# Altium PCB PCB2.PcbDoc
Units mm, origin at the board's own origin, x right, y up, seen from the top; angles counter-clockwise.
Board outline 113.63 x 80 mm, 2 copper layers (Top Layer, Bottom Layer); 39 components, 69 nets, 397 pads, 94 vias.
Unrouted connection lines stored in the file: 1.
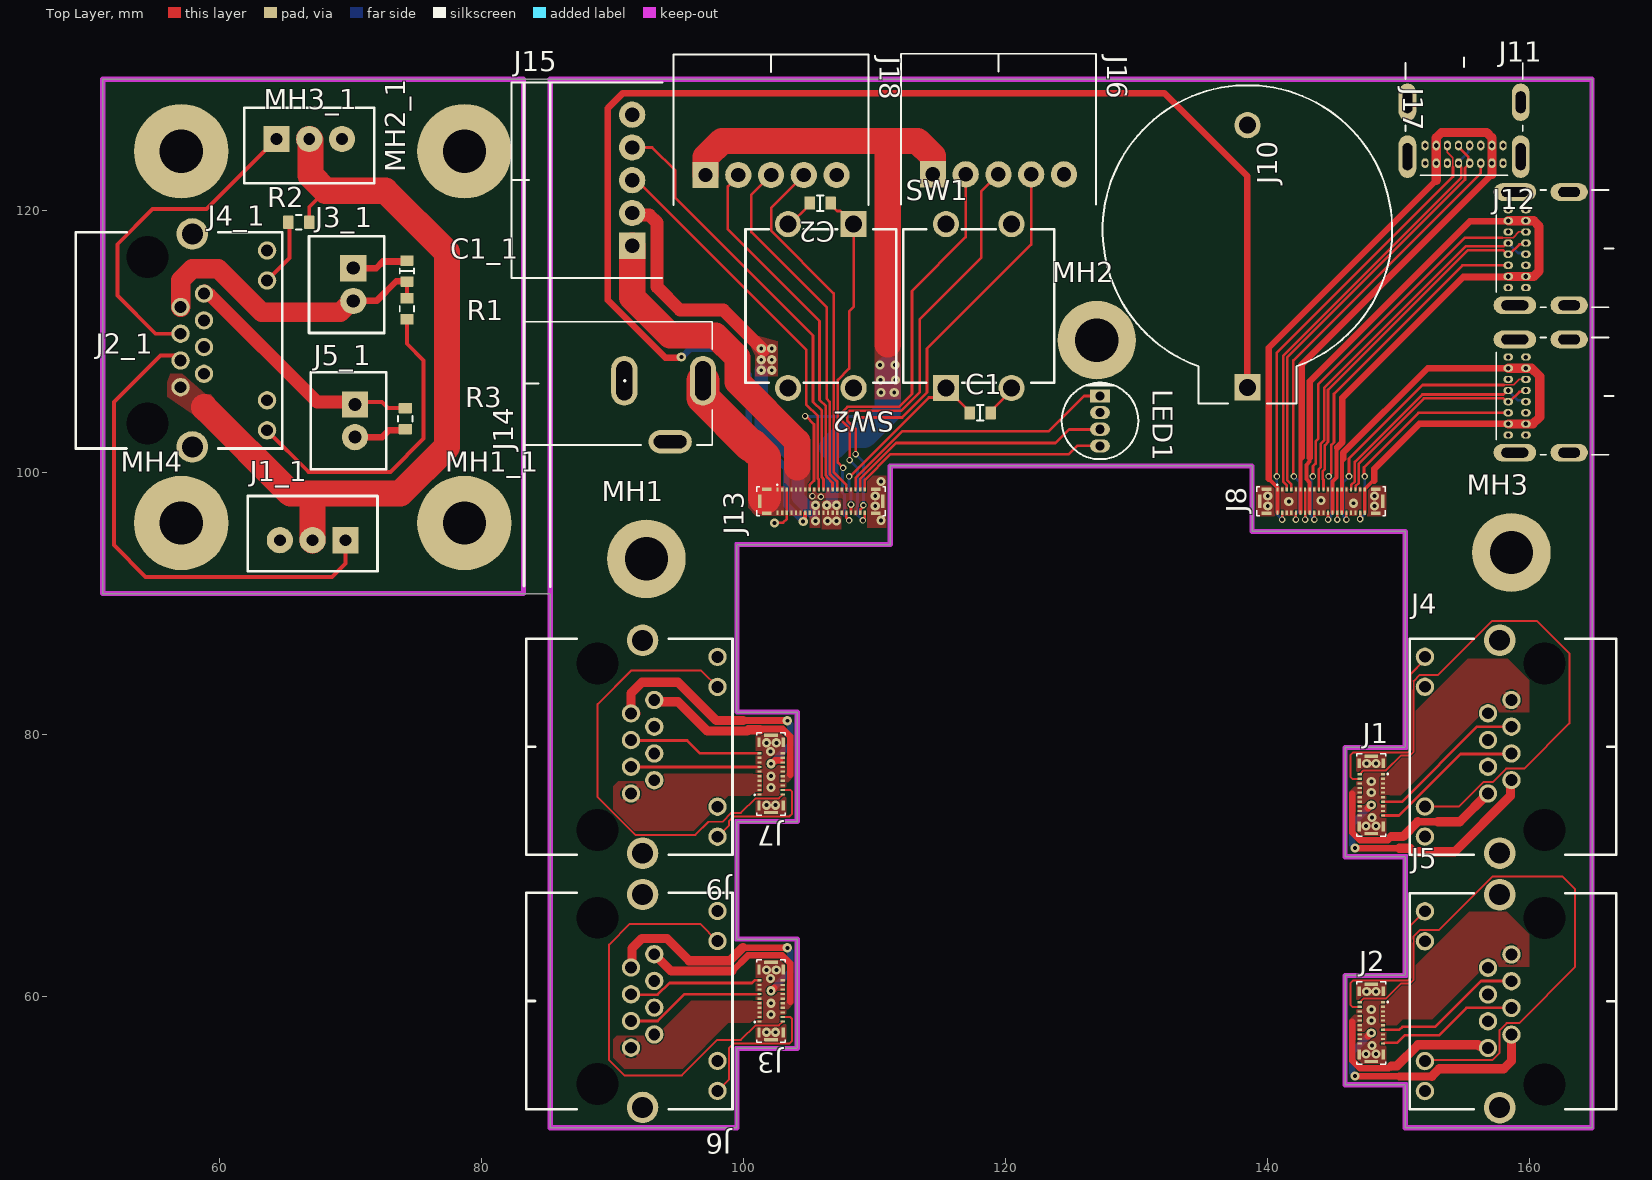
[diagram p0: Top Layer view]
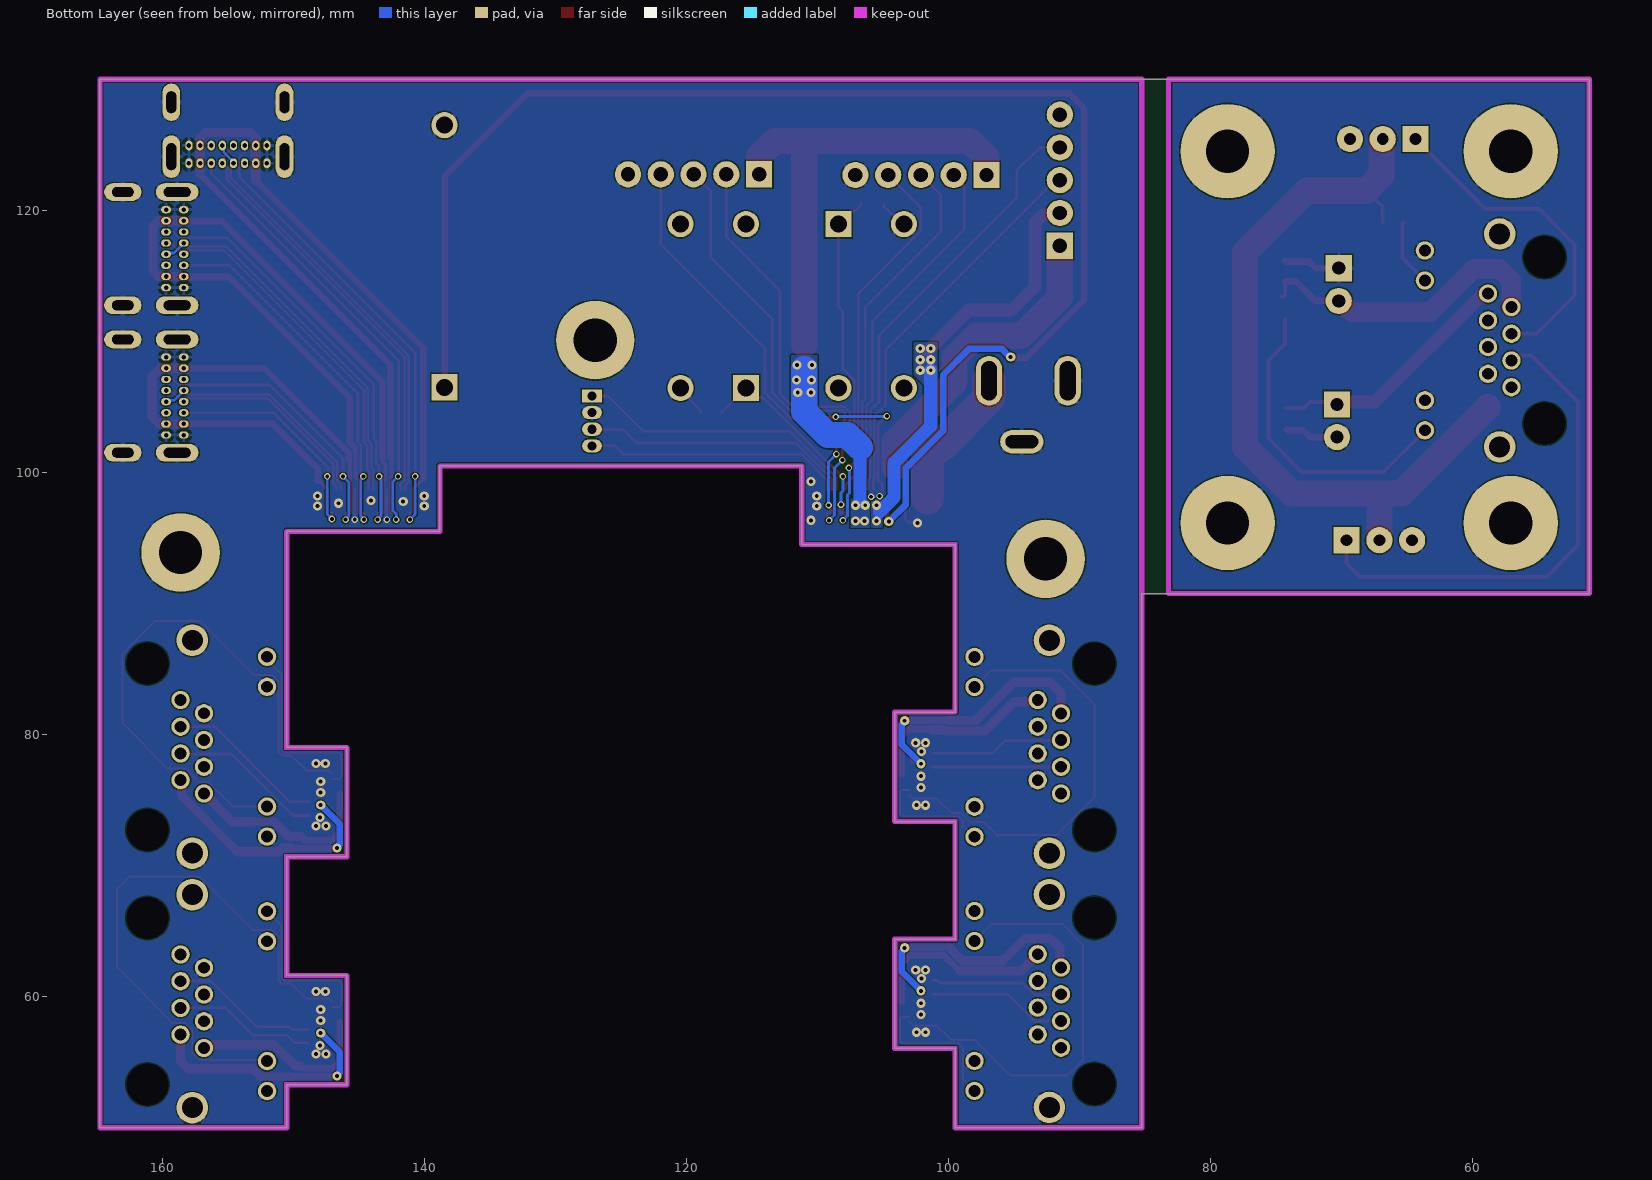
[diagram p1: Bottom Layer view, seen from below]

## Layer stack, top to bottom
Top Solder: solder mask 0.0102, Solder Resist, Dk 3.5
Top Layer: signal copper 0.0356
Dielectric 1: dielectric 0.32, FR-4, Dk 4.8
Bottom Layer: signal copper 0.0356
Bottom Solder: solder mask 0.0102, Solder Resist, Dk 3.5

## Board outline
85.25,50 99.5,50 99.5,56.05 104.1,56.05 104.1,64.4 99.5,64.4 99.5,73.35 104.1,73.35 104.1,81.7 99.508,81.7 99.5,81.692 99.5,94.5 111.2,94.5 111.2,100.5 138.8,100.5 138.8,95.5 150.5,95.5 150.5,79.026 145.9,79.026 145.9,70.677 150.5,70.677 150.5,61.624 145.9,61.624 145.9,53.275 150.5,53.275 150.5,50 164.75,50 164.75,130 89.15,130 89.168,130 51.124,130 51.124,90.75 85,90.75 85.001,90.749 85.25,90.749

## Design rules (kind name [scope] priority, off if disabled: settings)
Clearance [All] p1: gap=0.1 ignorepadtopadclearanceinfootprint=FALSE
HoleSize [All] p1: absolutevalues=TRUE maxlimit=6 minlimit=0.3 maxpercent=80.000 minpercent=20.000
HoleToHoleClearance [All] p1: gap=0.2 allowstackedmicrovias=TRUE
MinimumSolderMaskSliver [All] p1: minsoldermaskwidth=0.1
PlaneClearance [All] p1: clearance=0.2
PlaneConnect [All] p1: pad.planeconnectstyle=Relief pad.reliefexpansion=0.508 pad.reliefentries=4 pad.reliefconductorwidth=0.3 pad.reliefairgap=0.1 via.planeconnectstyle=Direct via.reliefexpansion=0.508 via.reliefentries=4 via.reliefconductorwidth=0.254 via.reliefairgap=0
PolygonConnect [All] p1: thpad.connectstyle=Relief thpad.reliefconductorwidth=0.3 thpad.reliefentries=4 thpad.polygonreliefangle="90 Angle" thpad.airgapwidth=0.1 thpad.conductorbypadedge=TRUE thpad.mindistance=0.381 thpad.enablemindistance=FALSE smdpad.connectstyle=Relief smdpad.reliefconductorwidth=0.18 smdpad.reliefentries=4 smdpad.polygonreliefangle="90 Angle" smdpad.airgapwidth=0.1 via.connectstyle=Direct via.reliefconductorwidth=0.254 via.reliefentries=4 via.polygonreliefangle="90 Angle" via.airgapwidth=0.254
RoutingVias [All] p1: holewidth=0.3 width=0.5 viastyle="Through Hole" minholewidth=0.3 minwidth=0.5 maxholewidth=1 maxwidth=1.5
SilkToSilkClearance [All] p1 off: silktosilkclearance=0.254
SolderMaskExpansion [All] p1: expansion=0.04 istentingtop=FALSE
SupplyNets "Schematic Supply Nets_1" [InNet('5V')] p1: voltage=0.000
SupplyNets "Schematic Supply Nets" [InNet('GND')] p2: voltage=0.000
Width [All] p1: maxlimit=3 minlimit=0.1 preferedwidth=0.15 minimp=50.000000 maximp=50.000000 favimp=50.000000
24 further rules are at their usual default settings.

## Classes and differential pairs
component class Sheet1: C1 C2 J1 J2 J3 J4 J5 J6 J7 J8 J9 J10 J11 J12 J13 J14 J15 J16 J17 J18 LED1 MH1 MH2 MH3 SW1 SW2

## Components (designator, comment, footprint, x,y, rotation, side; value= is the part's Value field where it differs from the comment)
C1 "10nF" "CAP 0603" 118.05,104.55 r0 top
C1_1 "100nF" "CAP 0603" 74.318,115.371 r90 top (schematic designator C1)
C2 "10nF" "CAP 0603" 105.85,120.55 r180 top
J1 "Lidar_carrier" 2167000209 147.9,75.4 r90 top locked
J1_1 "LiDAR_sensor" "JST XH B3B-XH-A" 67.119,94.835 r180 top (schematic designator J1)
J2 "Lidar_carrier" 2167000209 147.9,58 r90 top locked
J2_1 "Ether_connector" MTJ88ARX1FSMLG 57.046,106.507 r270 top (schematic designator J2)
J3 "Lidar_carrier" 2167000209 102.1,59.675 r270 top locked
J3_1 "LiDAR_Motor" "JST XH B2B-XH-A" 70.221,114.34 r270 top (schematic designator J3)
J4 "Lidar_conn" MTJ88ARX1FSMLG 158.59,82.645 r90 top locked
J4_1 "Servo_connector" "JST XH B3B-XH-A" 66.865,125.442 r0 top (schematic designator J4)
J5 "Lidar_conn" MTJ88ARX1FSMLG 158.59,63.226 r90 top locked
J5_1 "Magnet_connector" "JST XH B2B-XH-A" 70.348,103.946 r270 top (schematic designator J5)
J6 "Lidar_conn" MTJ88ARX1FSMLG 91.41,56.105 r270 top locked
J7 "Lidar_carrier" 2167000209 102.1,77 r270 top
J8 "USB_carrier" 2167000409 144.075,97.813 r180 top locked
J9 "Lidar_conn" MTJ88ARX1FSMLG 91.41,75.5 r270 top locked
J10 "USB-C" AMPHENOL_GSB1C211110DS1HR 154.98,127.65 r180 top
J11 "USB-C" AMPHENOL_GSB1C211110DS1HR 162.4,117.08 r90 top
J12 "USB-C" AMPHENOL_GSB1C211110DS1HR 162.4,105.83 r90 top
J13 "Display_MCU" 2167000409 105.925,97.813 r180 top locked
J14 "Power Jack" Power_Jack 96.9,107 r180 top value="CONN PWR JACK 2X5.5MM SOLDER"
J15 "Display_mcu" SHDRRA5W64P0X250_1X5_1490X1150X610P 91.5,117.3 r90 top
J16 "Stop" SHDRRA5W64P0X250_1X5_1490X1150X610P 114.45,122.75 r0 top
J17 "Battery" BAT_BH-25C-1 138.45,118.5 r270 top
J18 "Odometry" SHDRRA5W64P0X250_1X5_1490X1150X610P 97.1,122.7 r0 top
LED1 "RGB" LED_QBL8RGB60D0-2897 127.2,103.935 r270 top
MH1 "=VALUE" SCREW_M3.0#1 92.587,93.414 r0 top
MH1_1 "M3" SCREW_M3.0#2 78.636,95.724 r0 top (schematic designator MH1)
MH2 "=VALUE" SCREW_M3.0#1 126.951,110.099 r0 top
MH2_1 "M3" SCREW_M3.0#3 78.509,124.807 r0 top (schematic designator MH2)
MH3 "=VALUE" SCREW_M3.0#1 158.59,93.897 r0 top
MH3_1 "M3" SCREW_M3.0#4 56.284,124.426 r0 top (schematic designator MH3)
MH4 "M3" SCREW_M3.0#5 57.046,96.232 r0 top
R1 "300R" "RES 0603" 74.318,112.488 r270 top
R2 "300R" "RES 0603" 66.063,119.092 r180 top
R3 "1K" "RES 0603" 74.191,104.106 r90 top
SW1 "Button" COM10302 115.45,106.45 r90 top
SW2 "Button" COM10302 108.4,118.95 r270 top

## Footprints (in the part's own frame and the unit in brackets; to place one, negate y for a bottom-side part, rotate by r counter-clockwise, add the part's x,y. Pads: shape width x height; smd on the part's side, far side on the other; paste and mask are expansions set on the pad)
2167000209 [mm]
  rrect10% 0.17x0.325 smd: 1(1.575,-0.888) 2(1.225,-0.888) 3(0.875,-0.888) 4(0.525,-0.888) 5(0.175,-0.888) 6(-0.175,-0.888) 7(-0.525,-0.888) 8(-0.875,-0.888) 9(-1.225,-0.888) 10(-1.575,-0.888) 11(-1.575,0.888) 12(-1.225,0.888) 13(-0.875,0.888) 14(-0.525,0.888) 15(-0.175,0.888) 16(0.175,0.888) 17(0.525,0.888) 18(0.875,0.888) 19(1.225,0.888) 20(1.575,0.888)
  rrect10% 0.75x0.26 smd: MP1(-2.41,-0.92) MP2(-2.41,0.92) MP3(2.41,-0.92) MP4(2.41,0.92)
  rrect10% 0.26x1.04 smd: MP5(-2.945,0) MP6(2.945,0)
  silkscreen extent -3.15,-1.3 3.15,1.1
2167000409 [mm]
  rrect10% 0.17x0.325 smd: 1(3.325,-0.887) 2(2.975,-0.887) 3(2.625,-0.887) 4(2.275,-0.887) 5(1.925,-0.887) 6(1.575,-0.887) 7(1.225,-0.887) 8(0.875,-0.887) 9(0.525,-0.887) 10(0.175,-0.887) 11(-0.175,-0.887) 12(-0.525,-0.887) 13(-0.875,-0.887) 14(-1.225,-0.887) 15(-1.575,-0.887) 16(-1.925,-0.887) 17(-2.275,-0.887) 18(-2.625,-0.887) 19(-2.975,-0.887) 20(-3.325,-0.887) 21(-3.325,0.888) 22(-2.975,0.888) 23(-2.625,0.888) 24(-2.275,0.888) 25(-1.925,0.888) 26(-1.575,0.888) 27(-1.225,0.888) 28(-0.875,0.888) 29(-0.525,0.888) 30(-0.175,0.888) 31(0.175,0.888) 32(0.525,0.888) 33(0.875,0.888) 34(1.225,0.888) 35(1.575,0.888) 36(1.925,0.888) 37(2.275,0.888) 38(2.625,0.888) 39(2.975,0.888) 40(3.325,0.888)
  rrect10% 0.75x0.26 smd: MP1(-4.16,-0.92) MP3(-4.16,0.92) MP4(4.16,0.92) MP6(4.16,-0.92)
  rrect10% 0.26x1.04 smd: MP2(-4.695,0) MP5(4.695,0)
  silkscreen extent -4.9,-1.3 4.9,1.1
AMPHENOL_GSB1C211110DS1HR [mm]
  oval 0.55x0.75 hole 0.35 mask+0.05: 1(-2.975,4.05) 2(-2.125,4.05) 3(-1.275,4.05) 4(-0.425,4.05) 5(0.425,4.05) 6(1.275,4.05) 7(2.125,4.05) 8(2.975,4.05) 9(-2.975,2.7) 10(-2.125,2.7) 11(-1.275,2.7) 12(-0.425,2.7) 13(0.425,2.7) 14(1.275,2.7) 15(2.125,2.7) 16(2.975,2.7)
  oval 1.35x3.25 hole 0.75 slot 2.05 at 90 deg: SH1(-4.32,3.55) SH2(4.32,3.55)
  oval 1.35x2.85 hole 0.75 slot 1.65 at 90 deg: SH3(-4.32,-0.6) SH4(4.32,-0.6)
  silkscreen extent -4.47,-4 4.47,4.97, body extent -4.85,-3.7 4.85,5.27, height 0.25
BAT_BH-25C-1 [mm]
  rect 2x2 / inner round 2 / far side rect 2x2 hole 1.3: 1(12,0)
  round 2 hole 1.3: 2(-8,0)
  silkscreen extent -11.04,-11.05 13.25,11.05
"CAP 0603" [mm] "Chip Resistor, 2-Leads, Body 1.60x0.80mm"
  rrect10% 0.8x1 smd: 1(-0.8,0) 2(0.8,0)
  silkscreen extent -0.25,-0.6 0.25,0.6, body extent -0.8,-0.4 0.8,0.4, height 0.45
COM10302 [mm]
  rect 2x2 hole 1.3: 1(0,0)
  round 2 hole 1.3: 2(12.5,0) 3(0,-5) 4(12.5,-5)
  silkscreen extent 0.4,-8.25 12.1,3.25
"JST XH B2B-XH-A" [mm]
  rect 2x2 hole 1: 1(-1.25,0)
  round 2 hole 1: 2(1.25,0)
  silkscreen extent -3.7,-3.38 3.7,2.38, body extent -3.7,-3.38 3.7,2.38, height 7
"JST XH B3B-XH-A" [mm]
  rect 2x2 hole 0.9: 1(-2.5,0)
  round 2 hole 0.9: 2(0,0) 3(2.5,0)
  silkscreen extent -4.95,-3.38 4.95,2.38, body extent -4.95,-3.38 4.95,2.38, height 7
LED_QBL8RGB60D0-2897 [mm]
  rect 1x1.5 / inner oval 1x1.5 / far side rect 1x1.5 hole 0.7: 1(-1.905,0)
  oval 1x1.5 hole 0.7: 2(-0.635,0) 3(0.635,0) 4(1.905,0)
  silkscreen extent -2.92,-2.93 2.92,2.93
MTJ88ARX1FSMLG [mm]
  round 1.4 hole 0.9: 1(0,0) 2(-1.02,1.78) 3(-2.04,0) 4(-3.06,1.78) 5(-4.08,0) 6(-5.1,1.78) 7(-6.12,0) 8(-7.14,1.78) 11(3.29,6.6) 12(1,6.6) 13(-8.14,6.6) 14(-10.43,6.6)
  round 2.4 hole 1.6: 9(-11.695,0.89) 10(4.555,0.89)
  round 1.6 hole 3.2 unplated: MH3(2.78,-2.54) MH4(-9.92,-2.54)
  silkscreen extent -11.82,-8 4.68,7.75
Power_Jack [mm]
  oval 2x3.8 hole 1.2 slot 3 at 90 deg: 1(0,0) 2(6,0)
  oval 3.3x1.8 hole 1 slot 2.5 at 0 deg: 3(2.5,4.65)
  silkscreen extent -0.72,-4.5 13.68,4.9, body extent -0.76,-4.45 13.64,4.95, height 11.49
"RES 0603" [mm] "Chip Resistor, 2-Leads, Body 1.60x0.80mm"
  rrect10% 0.8x1 smd: 1(-0.8,0) 2(0.8,0)
  silkscreen extent -0.2,-0.55 0.2,0.55, body extent -0.8,-0.4 0.8,0.4, height 0.45
SCREW_M3.0#1 [mm] "M3 Screw Close FIt"
  round 6 hole 3.301: 1(0,0)
SCREW_M3.0#2 [mm] "M3 Screw Close FIt"
  round 7.2 hole 3.301: 1(0.064,0.42)
SCREW_M3.0#3 [mm] "M3 Screw Close FIt"
  round 7.2 hole 3.301: 1(0.191,-0.3)
SCREW_M3.0#4 [mm] "M3 Screw Close FIt"
  round 7.2 hole 3.301: 1(0.816,0.081)
SCREW_M3.0#5 [mm] "M3 Screw Close FIt"
  round 7.2 hole 3.301: 1(0.054,-0.088)
SHDRRA5W64P0X250_1X5_1490X1150X610P [mm]
  rect 2x2 / inner round 2 / far side rect 2x2 hole 1.1: 1(0,0)
  round 2 hole 1.1: 2(2.5,0) 3(5,0) 4(7.5,0) 5(10,0)
  silkscreen extent -2.45,-2.3 12.45,9.2

## Part data
C1 C1_1 C2: library part Capacitor, "SMT Capacitor"
J13: library part AUX_carrier
J14: library part "P_Power Jack", "Power Barrel Connector Jack 2.10mm ID (0.083\"), 5.50mm OD (0.217\") Through Hole, Right Angle", LCSC Part#=C136744, MFR Part #=PJ-102A, Digikey Link=https://www.digikey.com/product-detail/en/PJ-102A/CP-102A-ND/275425/?itemSeq=304982367, Type=Extended
J15: library part Display_connector
J16: library part Stop_connector
J18: library part Odomery_connector
LED1: library part RGB_LED, LCSC Part#=C130717, MFR Part #=NCD1206B1, Datasheet=https://datasheet.lcsc.com/lcsc/2008201033_Foshan-NationStar-Optoelectronics-NCD1206B1_C130717.pdf, Type=Extended
MH1 MH1_1 MH2 MH2_1 MH3 MH3_1 MH4: library part SCREW
R1 R2 R3: library part Res, "Resistor", Ordered by=Subcon, Published=8-Jun-2000, Publisher="Altium Limited", Revision="July-2002: Re-released for DXP Platform."

## Via types
v1: diameter 0.7, hole 0.3, Top Layer to Bottom Layer, tented both sides, 68 vias
v2: diameter 0.5, hole 0.3, Top Layer to Bottom Layer, tented both sides, 26 vias

## Nets (pads, with @x,y where several pads share a name; then routed paths per layer and width w, separated by ;. In a path a pad name is that pad's centre, name@x,y a point inside that pad or via, vN(x,y) a via of type N, cw(c..) or ccw(c..) an arc to the next point about the centre after c; other vN are vias at no path point)
5V: J13.27 J13.28 J13.29 J13.30 J16.1 J18.1 | length 49.4
  Top Layer w2: J18.1 97.1,124.05 98.35,125.3 111,125.3 ; 111,109.784 111,125.3 ; J16.1 114.45,124.128 113.278,125.3 111,125.3
  Bottom Layer w1: 106.75,97.75 106.75,101.9
  Bottom Layer w2: 106.75,101.9 107.7,102.85 109.2,102.85 111,104.65 111,107.9
  other v1: 106.4,96.3 107.1,96.3 106.35,97.5 107.1,97.5 110.5,106.1 111.5,106.1 110.45,107.05 111.6,107.05 110.4,108.2 111.55,108.2
+5: J1_1.2 J2_1.1 J4_1.2 R2.1 | length 59.7
  Top Layer w0.3: R2.1 66.863,120.244 68.124,121.505
  Top Layer w2: 58.846,104.973 65.428,98.391 67.119,98.391 ; J4_1.2 66.952,125.355 66.952,122.677 68.124,121.505 72.667,121.505 77.366,116.806 77.366,101.947 73.81,98.391 67.119,98.391 ; J1_1.2 67.119,98.391
D1_N: J8.3 J10.5 J10.12 | length 32.4
  Top Layer w0.2: J8.3 141.44,98.71 141.44,99.036 141.19,99.286 141.19,108.92 154.75,122.48 154.75,123.27 154.555,123.465 J10.5
  Bottom Layer w0.2: J10.5 154.555,123.705 155.309,124.459 155.309,124.854 J10.12
D1_P: J8.4 J10.4 J10.13 | length 32.5
  Top Layer w0.2: J8.4 141.8,99.1 141.5,99.4 141.5,108.8 155.05,122.35 155.05,123.233 155.405,123.588 J10.4 155.309,123.696 155.309,124.091 154.555,124.845 J10.13
D2_N: J8.10 J11.5 J11.12 | length 28.3
  Top Layer w0.2: J8.10 143.9,99.379 143.89,99.389 143.89,100.24 144.05,100.4 144.05,102.2 144.3,102.45 144.3,106.45 155.1,117.25 157.983,117.25 158.238,117.505 J11.5 J11.5@158.395,117.505
  Bottom Layer w0.2: J11.5 159.104,116.751 159.604,116.751 J11.12
D2_P: J8.11 J11.4 J11.13 | length 27.9
  Top Layer w0.2: J8.11 144.25,99.454 144.19,99.514 144.19,100.09 144.35,100.25 144.35,102.076 144.6,102.326 144.6,106.3 155.25,116.95 157.983,116.95 158.278,116.655 158.455,116.655 159.209,117.409 159.604,117.409 J11.13
  Bottom Layer w0.2: J11.13@159.604,117.409 J11.13
D3_N: J8.17 J12.5 J12.12 | length 17.9
  Top Layer w0.2: J8.17 146.36,98.71 146.36,99.034 146.65,99.324 146.65,100.8 151.8,105.95 157.983,105.95 158.288,106.255 J12.5
  Bottom Layer w0.2: J12.5 159.104,105.501 159.604,105.501 J12.12
D3_P: J8.18 J12.4 J12.13 | length 17.3
  Top Layer w0.2: J8.18 146.71,98.71 146.71,98.959 146.95,99.199 146.95,100.676 151.924,105.65 157.983,105.65 158.228,105.405 158.455,105.405 159.209,106.159 159.604,106.159 J12.13
GND: C1.2 C1_1.2 C2.2 J1.1 J1.6 J1.8 J1.9 J1.11 J1.14 J1.15 J1.18 J1.MP1 J1.MP2 J1.MP3 J1.MP4 J1.MP5 J1.MP6 J1_1.3 J2.1 J2.6 J2.8 J2.9 J2.11 J2.14 J2.15 J2.18 J2.MP1 J2.MP2 J2.MP3 J2.MP4 J2.MP5 J2.MP6 J2_1.2 J2_1.4 J2_1.6 J2_1.9 J2_1.10 J2_1.12 J2_1.14 J3.1 J3.6 J3.8 J3.9 J3.11 J3.14 J3.15 J3.18 J3.MP1 J3.MP2 J3.MP3 J3.MP4 J3.MP5 J3.MP6 J3_1.1 J4.2 J4.4 J4.6 J4.9 J4.10 J4.12 J4.14 J4_1.3 J5.2 J5.4 J5.6 J5.9 J5.10 J5.12 J5.14 J5_1.2 J6.2 J6.4 J6.6 J6.9 J6.10 J6.12 J6.14 J7.1 J7.6 J7.8 J7.9 J7.11 J7.14 J7.15 J7.18 J7.MP1 J7.MP2 J7.MP3 J7.MP4 J7.MP5 J7.MP6 J8.2 J8.5 J8.7 J8.9 J8.12 J8.14 J8.16 J8.19 J8.23 J8.24 J8.27 J8.30 J8.31 J8.34 J8.37 J8.38 J8.MP1 J8.MP2 J8.MP3 J8.MP4 J8.MP5 J8.MP6 J9.2 J9.4 J9.6 J9.9 J9.10 J9.12 J9.14 J10.1 J10.8 J10.9 J10.16 J10.SH1 J10.SH2 J10.SH3 J10.SH4 J11.1 J11.8 J11.9 J11.16 J11.SH1 J11.SH2 J11.SH3 J11.SH4 J12.1 J12.8 J12.9 J12.16 J12.SH1 J12.SH2 J12.SH3 J12.SH4 J13.3 J13.9 J13.12 J13.15 J13.17 J13.23 J13.26 J13.38 J13.MP1 J13.MP2 J13.MP3 J14.2 J14.3 J15.5 J16.5 J17.2 J18.5 LED1.2 MH1.1 MH1_1.1 MH2.1 MH2_1.1 MH3.1 MH3_1.1 MH4.1 R3.1 SW1.3 SW2.3 | length 21.1
  Top Layer w0.2: v1(102.356,96.15) 102.375,96.169 103.006,96.169 103.3,96.462 J13.3 ; SW2.3 103.55,118.95 104.95,120.35 C2.2@104.95,120.45 ; C1.2@118.9,104.6 118.9,104.7 120.45,106.25 SW1.3 ; v2(142.85,96.4) J8.34 J8.7 ; v2(145.3,96.4) J8.27 J8.14
  Top Layer w0.5: J3_1.1 71.978,115.59 72.486,116.098 74.245,116.098 C1_1.2 ; J5_1.2 72.413,102.696 72.941,103.224 74.109,103.224 R3.1
  other v1: 147.5,55.625 148.25,55.625 147.945,56.28 101.75,57.29 102.45,57.29 147.9,58.175 102.1,58.65 147.9,59.025 102.1,59.5 147.55,60.385 148.25,60.385 102.055,61.395 101.75,62.05 102.5,62.05 147.5,73.025 148.25,73.025 147.945,73.68 101.75,74.615 102.45,74.615 147.9,75.575 102.1,75.975 147.9,76.425 102.1,76.825 147.55,77.785 148.25,77.785 102.055,78.72 101.75,79.375 102.5,79.375 110.5,96.35 110.05,97.45 140,97.45 148.15,97.45 146.55,97.65 141.606,97.787 144.056,97.85 110.05,98.2 140,98.2 148.15,98.2 110.5,99.3
  other v2: 105.9,98.15 105.251,98.201
LidTX: J1_1.1 J2_1.3 | length 38.3
  Top Layer w0.3: J2_1.3@57.046,108.924 55.514,108.924 51.966,105.376 51.966,94.454 54.379,92.041 68.603,92.041 69.619,93.057 J1_1.1
Mag/LED+: J2_1.8 J5_1.1 R3.2 | length 19.2
  Top Layer w0.3: J5_1.1 70.528,105.376 72.413,105.376 72.883,104.906 R3.2
  Top Layer w1: J2_1.8@58.903,113.832 58.903,113.679 59.011,113.57 59.28,113.57 67.474,105.376 70.168,105.376 J5_1.1
Motor+: C1_1.1 J2_1.7 J3_1.2 R1.1 | length 23.4
  Top Layer w0.3: C1_1.1 74.318,113.538 74.441,113.415 R1.1@74.572,113.415
  Top Layer w0.5: J3_1.2 71.999,113.09 73.495,114.586 74.303,114.586 C1_1.1
  Top Layer w1.5: J2_1.7 57.046,114.657 57.925,115.536 59.925,115.536 63.227,112.234 69.23,112.234 70.086,113.09 J3_1.2
NetC1_1: C1.1 J13.24 SW1.1 | length 15.7
  Top Layer w0.2: v2@108.063,99.687 108.114,99.687 114.145,105.717 114.55,105.717 115.35,106.517 115.383,106.517 SW1.1 116.95,104.95 C1.1@117.3,104.6 ; J13.24 v2(108.2,97.55)
  Bottom Layer w0.2: v2(108.05,99.7) 108.05,98.591 108.2,98.441 v2(108.2,97.55)
NetC2_1: C2.1 J13.25 SW2.1 | length 26.6
  Top Layer w0.2: C2.1 106.65,120.45 107.15,119.95 107.4,119.95 SW2.1 108.4,112.632 108.062,112.294 108.062,107.927 107.195,107.061 107.195,100.755 v2(107.6,100.35) ; J13.25 107.85,96.55 v2(108.05,96.35)
  Bottom Layer w0.2: v2(107.6,100.35) 107.55,100.3 107.55,98.45 107.7,98.3 107.7,96.7 v2(108.05,96.35)
NetJ1_2: J1.2 J1.3 J1.4 J1.5 J4.1
NetJ1_7: J1.7 J4.3 | length 12.2
  Top Layer w0.2: J1.7 150.251,74.875 155.981,80.605 J4.3
NetJ1_10: J1.10 J4.5 | length 12.1
  Top Layer w0.2: J1.10 150.013,73.825 154.705,78.516 158.217,78.516 158.722,78.011 J4.5@158.722,78.004
NetJ1_12: J1.12 J1.13 J4.7 | length 19.4
  Top Layer w0.5: v1(146.66,71.344) 146.679,71.325 150.05,71.325 ; 147.65,74.375 v1(147.9,74.625)
  Top Layer w0.7: 150.05,71.325 150.828,71.325 151.088,71.065 154.265,71.065 158.52,75.32 158.52,76.455 J4.7@158.66,76.595
  Bottom Layer w0.5: v1(146.66,71.344) 146.66,71.398 146.45,71.608 146.45,73.175 v1(147.9,74.625)
NetJ1_16: J1.16 J1.17 J4.8 | length 15
  Top Layer w0.5: 146.45,75.475 146.45,72.525 147.05,71.925 149.158,71.925 149.448,72.215
  Top Layer w0.6: 151.45,73.35 152.977,73.35
  Top Layer w0.7: 149.448,72.215 150.315,72.215 151.45,73.35 ; 152.977,73.35 154.655,73.35 J4.8
NetJ1_19: J1.19 J4.11 | length 14.7
  Top Layer w0.15: J1.19 146.45,76.625 146.3,76.775 146.3,78.425 146.525,78.65 149.846,78.65 150.714,78.65 150.875,78.811 150.875,84.585 151.99,85.7 J4.11
NetJ1_20: J1.20 J4.13 | length 44
  Top Layer w0.1: 151.125,83.416 151.125,84.075
  Top Layer w0.15: J1.20 147.297,77.26 149.015,77.26 150.155,78.4 150.817,78.4 151.125,78.708 151.125,83.416 ; 151.125,84.075 151.6,84.55 153,84.55 157.1,88.65 160.55,88.65 163.01,86.19 163.01,80.858 159.562,77.41 158.19,77.41 157.16,76.38 156.448,76.38 154.573,74.505 J4.13
NetJ2_2: J2.2 J2.3 J2.4 J2.5 J5.1
NetJ2_7: J2.7 J5.3 | length 11.3
  Top Layer w0.2: J2.7@148.85,57.485 150.044,57.485 150.263,57.704 152.776,57.704 156.271,61.199 158.577,61.199 J5.3
NetJ2_10: J2.10 J5.5 | length 11.3
  Top Layer w0.2: J2.10@148.85,56.435 148.901,56.485 149.877,56.485 150.447,57.055 153.066,57.055 155.165,59.155 158.257,59.155 J5.5@158.82,58.592
NetJ2_11: J2_1.11 R1.2 | length 23.9
  Top Layer w0.3: J2_1.11 66.821,100.042 73.048,100.042 75.588,102.582 75.588,108.551 74.318,109.821 R1.2
NetJ2_12: J2.12 J2.13 J5.7 | length 18.8
  Top Layer w0.5: v1(146.66,53.944) 146.679,53.925 150.05,53.925 ; 147.65,56.975 v1(147.9,57.225)
  Top Layer w0.6: 150.053,53.922 152.509,53.922
  Top Layer w0.7: 152.509,53.922 153.09,54.503 158.005,54.503 158.59,55.088 J5.7
  Bottom Layer w0.5: v1(146.66,53.944) 146.66,53.998 146.45,54.208 146.45,55.775 v1(147.9,57.225)
NetJ2_13: J2_1.13 R2.2 | length 5.5
  Top Layer w0.3: J2_1.13@63.944,114.647 J2_1.13 65.352,116.353 65.352,119.003 R2.2
NetJ2_16: J2.16 J2.17 J5.8 | length 14.4
  Top Layer w0.5: 146.45,58.075 146.45,55.125 147.05,54.525 149.247,54.525 149.445,54.724
  Top Layer w0.7: 149.445,54.724 149.859,54.724 151.47,56.335 156.066,56.335 156.181,56.22 156.676,56.22 J5.8
NetJ2_19: J2.19 J5.11 | length 12.7
  Top Layer w0.15: J2.19 146.45,59.225 146.3,59.375 146.3,61.025 146.525,61.25 150.714,61.25 150.875,61.411 150.875,65.401 J5.11
NetJ2_20: J2.20 J5.13 | length 44.1
  Top Layer w0.1: 151.125,64.094 151.125,64.401
  Top Layer w0.15: J2.20 147.297,59.86 149.015,59.86 150.155,61 150.817,61 151.125,61.308 151.125,64.094 ; 151.125,64.401 151.125,64.598 151.628,65.101 153.075,65.101 157.13,69.156 162.5,69.156 163.459,68.197 163.459,62.27 159.177,57.988 158.234,57.988 157.7,57.453 157.7,55.739 157.124,55.163 152.067,55.163 J5.13
NetJ3_2: J3.2 J3.3 J3.4 J3.5 J6.1
NetJ3_7: J3.7 J6.3 | length 10.7
  Top Layer w0.2: J6.3 93.445,58.145 95.5,60.2 J3.7
NetJ3_10: J3.10 J6.5 | length 10.3
  Top Layer w0.2: J6.5 91.445,60.15 93.45,60.15 94.35,61.05 100.65,61.05 100.85,61.25 J3.10
NetJ3_12: J3.12 J3.13 J6.7 | length 19.1
  Top Layer w0.5: 99.95,63.75 103.321,63.75 v1(103.34,63.731) ; v1(102.1,60.45) 102.35,60.7
  Top Layer w0.7: J6.7 91.48,62.295 91.48,63.68 92.25,64.45 94.15,64.45 95.85,62.75 98.95,62.75 99.95,63.75
  Bottom Layer w0.5: v1(102.1,60.45) 103.55,61.9 103.55,63.467 103.34,63.677 v1(103.34,63.731)
NetJ3_16: J3.16 J3.17 J6.8 | length 14.6
  Top Layer w0.5: 99.1,61.95 99.14,61.95 100.34,63.15 102.95,63.15 103.55,62.55 103.55,59.6
  Top Layer w0.7: J6.8 94.485,61.95 99.1,61.95
NetJ3_19: J3.19 J6.11 | length 11.1
  Top Layer w0.15: J6.11 98.9,53.705 98.9,56.1 99.225,56.425 103.475,56.425 103.7,56.65 103.7,58.3 103.55,58.45 J3.19
NetJ3_20: J3.20 J6.13 | length 33.7
  Top Layer w0.15: J6.13 96.705,65.55 91.323,65.55 89.75,63.977 89.75,55.157 90.907,54 95.3,54 98,56.7 99.8,56.7 100.915,57.815 102.703,57.815 J3.20
NetJ7_2: J7.2 J7.3 J7.4 J7.5 J9.1
NetJ7_7: J7.7 J9.3 | length 10
  Top Layer w0.2: J9.3@91.164,77.525 J7.7
NetJ7_10: J7.10 J9.5 | length 10.2
  Top Layer w0.2: J9.5@91.413,79.55 95.7,79.55 96.675,78.575 J7.10
NetJ7_12: J7.12 J7.13 J9.7 | length 20.1
  Top Layer w0.5: 99.95,81.075 103.321,81.075 v1(103.34,81.056) ; v1(102.1,77.775) 102.154,77.775 102.429,78.05 102.75,78.05
  Top Layer w0.7: J9.7@91.77,81.62 J9.7 91.41,83.16 92.25,84 95,84 97.925,81.075 99.95,81.075
  Bottom Layer w0.5: v1(102.1,77.775) 103.55,79.225 103.55,80.792 103.34,81.002 v1(103.34,81.056)
NetJ7_16: J7.16 J7.17 J9.8 | length 14.6
  Top Layer w0.5: 101.252,80.375 101.393,80.375 101.443,80.425 103,80.425 103.55,79.875 103.55,76.925
  Top Layer w0.7: J9.8 93.324,82.506 94.994,82.506 97.225,80.275 100.281,80.275 100.381,80.375 101.252,80.375
NetJ7_19: J7.19 J9.11 | length 9.5
  Top Layer w0.15: J9.11@97.695,71.895 98.9,73.1 98.9,73.425 99.225,73.75 103.475,73.75 103.7,73.975 103.7,75.625 103.55,75.775 J7.19
NetJ7_20: J7.20 J9.13 | length 34.6
  Top Layer w0.15: J9.13@98.129,83.521 96.75,84.9 91.45,84.9 88.87,82.32 88.87,75.23 91.75,72.35 96.325,72.35 97.325,73.35 98.4,73.35 99.075,74.025 99.8,74.025 100.915,75.14 102.703,75.14 J7.20
NetJ8_1: J8.1 J8.6 J8.35 J8.40 J10.2 J10.7 J10.10 J10.15 | length 73.4
  Top Layer w0.3: 140.072,99.528 140.75,98.85 J8.40 ; J8.35 J8.6 142.5,101.058 142.592,101.15
  Top Layer w0.5: 140.072,99.528 140.072,109.522 152.855,122.305 ; 142.592,101.15 142.592,101.391 142.6,101.399 142.6,108.25 157.105,122.755
  Top Layer w0.7: 152.855,122.305 J10.7 152.855,125.54 153.265,125.95 156.695,125.95 157.105,125.54 J10.2 157.105,122.755
NetJ8_8: J8.8 J8.13 J8.28 J8.33 J11.2 J11.7 J11.10 J11.15 | length 64.5
  Top Layer w0.3: 143.192,101.142 143.192,100.832 142.94,100.58 142.94,99.493 143.2,99.233 J8.8 J8.33 ; J8.28 J8.13 144.95,99.303 145.25,99.603 145.25,101.85 145.3,101.9
  Top Layer w0.5: 143.192,101.142 143.2,101.15 143.2,106.95 155.425,119.175 158.32,119.175 J11.7 ; 145.3,101.9 145.3,101.915 145.7,102.315 145.7,105.7 154.917,114.917 158.312,114.917 J11.2
  Top Layer w0.7: J11.2 160.29,114.955 160.7,115.365 160.7,118.795 160.29,119.205 J11.7
NetJ8_15: J8.15 J8.20 J8.21 J8.26 J12.2 J12.7 J12.10 J12.15 | length 43.6
  Top Layer w0.3: J8.26 J8.15 145.65,100.95 145.75,101.05 ; J8.21 147.4,98.749 148.021,99.37 148.119,99.37
  Top Layer w0.5: 145.75,101.05 145.75,101.501 152.204,107.955 J12.7 ; 148.119,99.37 148.119,100.269 151.555,103.705 J12.2
  Top Layer w0.7: J12.2 160.228,103.705 160.75,104.227 160.75,107.33 160.125,107.955 J12.7
NetJ8_22: J8.22 J12.3 | length 17.3
  Top Layer w0.2: v2(147.05,96.45) J8.22 ; v2(147.4,99.7) 147.346,99.754 147.346,100.396 151.505,104.555 J12.3@158.35,104.555
  Bottom Layer w0.2: v2(147.05,96.45) 147.4,96.8 v2(147.4,99.7)
NetJ8_25: J8.25 J12.14 | length 21.5
  Top Layer w0.1: 157.998,106.675 158.003,106.68 158.762,106.68 159.187,107.105 J12.14
  Top Layer w0.2: v2(146,96.4) J8.25 ; v2(146.2,99.7) 146.2,101.05 151.825,106.675 157.998,106.675
  Bottom Layer w0.2: v2(146,96.4) 146,96.417 145.75,96.667 145.75,99.25 v2(146.2,99.7)
NetJ8_29: J8.29 J11.3 | length 27.8
  Top Layer w0.2: v2(144.6,96.4) J8.29 ; v2(144.64,99.7) 144.64,99.757 144.85,99.967 144.85,102.101 145.05,102.301 145.05,106 154.855,115.805 J11.3
  Bottom Layer w0.2: v2(144.6,96.4) 144.6,96.417 144.85,96.667 144.85,99.433 144.64,99.643 v2(144.64,99.7)
NetJ8_32: J8.32 J11.14 | length 31.8
  Top Layer w0.1: 157.876,117.915 157.891,117.93 158.73,117.93 159.155,118.355 J11.14
  Top Layer w0.2: v2(143.44,99.7) 143.45,99.71 143.45,100.489 143.65,100.689 143.65,102.373 143.85,102.573 143.85,106.7 155.065,117.915 157.876,117.915 ; v2(143.55,96.4) J8.32
  Bottom Layer w0.2: v2(143.44,99.7) 143.44,99.619 143.3,99.479 143.3,96.667 143.55,96.417 v2(143.55,96.4)
NetJ8_36: J8.36 J10.3 | length 33.7
  Top Layer w0.2: v2@141.95,99.897 141.95,108.55 156.255,122.855 J10.3 ; v2(142.15,96.4) J8.36
  Bottom Layer w0.2: v2(142,99.7) 142.4,99.3 142.4,97.1 142.15,96.85 v2(142.15,96.4)
NetJ8_39: J8.39 J10.14 | length 35
  Top Layer w0.1: J10.14 153.705,124.445 154.129,124.021 154.129,123.877 154.13,123.876 154.13,123.279
  Top Layer w0.2: v2(140.7,99.7) 140.7,109.15 154.13,122.58 154.13,123.279 ; v2(141.1,96.4) J8.39
  Bottom Layer w0.2: v2(140.7,99.7) 140.7,96.8 v2@141.086,96.414
NetJ13_1: J13.1 J13.2 J13.39 J13.40 J13.MP4 J13.MP5 J13.MP6 J14.1 | length 11
  Top Layer w2.5: J14.1 96.9,105.7 100.55,102.05 100.701,102.05 101.6,101.151 101.6,98.05
NetJ13_4: J13.4 J13.5 J13.6 J13.7 J13.35 J13.36 J13.37 J15.1 | length 24.1
  Top Layer w2: J15.1 91.5,113.35 94.4,110.45 97.85,110.45 99.55,108.75 99.55,106.9 104.1,102.35 104.1,100.4
NetJ13_8: J13.8 J16.4 | length 36.1
  Top Layer w0.2: v2(104.7,104.3) 104.75,104.3 105.375,103.675 105.375,99.375 105.05,99.05 J13.8 ; v2(108.6,104.25) 108.65,104.2 112.1,104.2 114,106.1 114,109.45 121.95,117.4 J16.4
  Bottom Layer w0.2: v2(104.7,104.3) 104.725,104.275 108.575,104.275 v2(108.6,104.25)
NetJ13_10: J13.10 J15.3 | length 29.7
  Top Layer w0.2: J15.3 91.85,122.3 104.782,109.368 104.782,105.204 105.675,104.311 105.675,99.528 105.75,99.453 J13.10
NetJ13_11: J13.11 J15.4 | length 33
  Top Layer w0.2: J15.4 93.021,124.8 94.794,123.027 94.794,120.956 105.3,110.45 105.3,105.391 105.975,104.716 105.975,99.652 106.05,99.577 106.05,99.526 106.1,99.476 J13.11
NetJ13_13: J13.13 J18.2 | length 27.6
  Top Layer w0.2: J18.2 99.6,122.627 98.8,121.827 98.8,118.55 105.8,111.55 105.8,105.542 106.275,105.067 106.275,99.776 106.35,99.701 106.35,99.65 106.79,99.21 106.79,98.71 J13.13
NetJ13_14: J13.14 J18.3 | length 27.3
  Top Layer w0.2: J18.3 100.6,121.2 100.6,118.35 106.35,112.6 106.35,105.613 106.575,105.388 106.575,99.901 106.65,99.826 106.65,99.8 107.14,99.31 107.14,98.71 J13.14
NetJ13_16: J13.16 J18.4 | length 27.4
  Top Layer w0.2: J18.4 102.1,120.2 102.1,118.45 106.875,113.675 106.875,100.025 107.84,99.06 J13.16@107.84,98.763
NetJ13_18: J13.18 LED1.1 | length 22.1
  Top Layer w0.2: J13.18 108.55,99.576 112.124,103.15 123.3,103.15 125.99,105.84 LED1.1
NetJ13_19: J13.19 LED1.3 | length 20.7
  Top Layer w0.2: J13.19 108.9,99.501 111.649,102.25 123.8,102.25 124.83,103.28 LED1.3@127.25,103.28
NetJ13_20: J13.20 LED1.4 | length 19.8
  Top Layer w0.2: J13.20 109.25,99.427 111.223,101.4 124.827,101.4 125.457,102.03 LED1.4
NetJ13_21: J13.21 J16.2 | length 33.9
  Top Layer w0.2: v2(108.1,100.95) 108.1,103.339 107.5,103.939 107.5,104.57 107.935,105.005 111.855,105.005 112.85,106 112.85,113.85 116.95,117.95 J16.2 ; v2(109.1,96.35) 109.1,96.431 109.25,96.581 J13.21
  Bottom Layer w0.2: v2(108.1,100.95) 108.7,100.35 108.7,96.75 v2(109.1,96.35)
NetJ13_22: J13.22 J16.3 | length 33.5
  Top Layer w0.2: v2(108.55,101.4) 108.55,103.314 107.9,103.964 107.9,104.546 108.059,104.705 112.005,104.705 113.45,106.15 113.45,111.7 118.128,116.378 118.128,121.428 J16.3 ; J13.22 108.91,96.935 108.91,97.179 109.15,97.419 v2(109.15,97.5)
  Bottom Layer w0.2: v2(108.55,101.4) 109.15,100.8 v2(109.15,97.5)
NetJ13_31: J13.31 J13.32 J15.2 | length 29.7
  Top Layer w1: J15.2 91.65,119.65 92.814,119.65 93.4,119.064 93.4,114.15 95.15,112.4 98.45,112.4 v1@101.525,109.325
  Bottom Layer w1: v1(101.35,107.8) 101.35,103.55 104.15,100.75 104.15,98.1 105.25,97
  other v1: 105.5,96.3 105.5,97.5 102.15,107.8 101.35,108.6 102.15,108.6 101.35,109.45 102.15,109.45
NetJ13_34: J13.34 J17.1 | length 110
  Top Layer w0.3: v1(104.55,96.25) 104.55,96.304 104.7,96.454 104.7,96.533 J13.34
  Top Layer w0.5: v1(95.25,108.8) 95.212,108.762 94.038,108.762 89.65,113.15 89.65,127.807 90.793,128.95 132.1,128.95 138.45,122.6 J17.1
  Bottom Layer w0.5: v1(95.25,108.8) 95.304,108.8 95.954,109.45 98.4,109.45 100.4,107.45 100.4,103.2 103.25,100.35 103.25,97.55 v1(104.55,96.25)
SrvoCntrl: J2_1.5 J4_1.1 | length 26
  Top Layer w0.3: J2_1.5 55.137,110.587 52.22,113.504 52.22,117.417 54.911,120.108 59.031,120.108 J4_1.1 ; J4_1.1@64.027,125.779 J4_1.1@64.452,126.204
pads on no net: J2_1.MH3 J2_1.MH4 J4.MH3 J4.MH4 J5.MH3 J5.MH4 J6.MH3 J6.MH4 J9.MH3 J9.MH4 J10.6 J10.11 J11.6 J11.11 J12.6 J12.11 J13.33 SW1.2 SW1.4 SW2.2 SW2.4

## Polygon pours and split planes (outlines as drawn)
+5 on Top Layer "+5_L01_P082" (solid, pour order 82): 56.03,106.9 56.242,107.535 57.185,107.535 58.951,105.955 59.352,105.955 60.444,104.505 58.951,103.471 57.984,104.438 56.03,105.78
NetJ1_2 on Top Layer "NETJ1_2_L01_P052" (solid, pour order 52): 159.95,81.7 159.95,84.14 158.32,85.77 155.25,85.77 151.21,81.73 151.21,79.384 148.6,76.774 148.6,75.422 148.999,75.422 149.293,75.375 150.132,75.375 156.457,81.7
NetJ2_2 on Top Layer "NETJ2_2_L01_P051" (solid, pour order 51): 159.95,62.299 159.95,64.751 158.229,66.472 155.364,66.472 151.257,62.366 151.257,62.031 148.6,59.374 148.6,57.832 149.848,57.832 150.3,58.283 152.533,58.283 156.549,62.299
NetJ2_12 on Top Layer "NETJ2_12_L01_P048" (solid, pour order 48): 146.85,56.675 147.7,56.675 148.175,57.15 147.884,57.441 147.684,57.49 147.419,57.225 146.85,57.225
GND on Top Layer "GND_L01_P060" (solid, pour order 60): 149.053,61.175 149.053,56.175 149.053,54.775 146.747,54.775 146.747,61.175
NetJ2_16 on Top Layer "NETJ2_16_L01_P056" (solid, pour order 56): 146.7,57.926 146.812,58.048 147.173,58.048 147.173,58.625 146.6,58.625 146.2,58.225 146.2,56.702 146.7,56.702
NetJ1_12 on Top Layer "NETJ1_12_L01_P047" (solid, pour order 47): 146.85,74.075 147.7,74.075 148.175,74.55 147.884,74.841 147.684,74.89 147.419,74.625 146.85,74.625
GND on Top Layer "GND_L01_P059" (solid, pour order 59): 149.053,78.575 149.053,73.575 149.053,72.175 146.747,72.175 146.747,78.575
NetJ1_16 on Top Layer "NETJ1_16_L01_P055" (solid, pour order 55): 146.7,75.326 146.812,75.448 147.173,75.448 147.173,76.025 146.6,76.025 146.2,75.625 146.2,74.102 146.7,74.102
NetJ7_12 on Top Layer "NETJ7_12_L01_P045" (solid, pour order 45): 103.149,78.325 102.299,78.325 101.824,77.85 102.116,77.558 102.315,77.509 102.581,77.775 103.149,77.775
NetJ7_2 on Top Layer "NETJ7_2_L01_P054" (solid, pour order 54): 90.05,76.05 90.05,72.673 96.198,72.673 98.85,75.325 100.519,75.325 100.982,75.626 101.4,75.626 101.4,76.978 101.001,76.978 100.707,77.025 93.725,77.025 93.141,76.441 90.441,76.441
NetJ7_16 on Top Layer "NETJ7_16_L01_P058" (solid, pour order 58): 103.3,77.074 103.188,76.952 102.827,76.952 102.827,76.375 103.4,76.375 103.8,76.775 103.8,78.298 103.3,78.298
NetJ7_12 on Top Layer "NETJ7_12_L01_P050" (solid, pour order 50): 103.15,78.325 102.3,78.325 101.825,77.85 102.116,77.559 102.316,77.51 102.581,77.775 103.15,77.775
GND on Top Layer "GND_L01_P061" (solid, pour order 61): 100.947,73.825 100.947,78.825 100.947,80.225 103.253,80.225 103.253,73.825
5V on Top Layer "5V_L01_P080" (solid, pour order 80): 112,105.6 110,105.6 110,109.65 110.2,109.85 112,109.85
GND on Top Layer "GND_L01_P077" (solid, pour order 77): 104.9,96.75 104.9,98.85 109.6,98.85 109.6,96.75
NetJ13_31 on Top Layer "NETJ13_31_L01_P074" (solid, pour order 74): 105.9,97.845 105.9,95.8 105.05,95.8 105.05,97.845
5V on Top Layer "5V_L01_P073" (solid, pour order 73): 107.45,97.928 107.45,95.678 105.95,95.678 105.95,97.928
NetJ13_31 on Top Layer "NETJ13_31_L01_P072" (solid, pour order 72): 100.598,109.53 100.9,108.919 100.9,107.35 102.6,107.35 102.6,110 101.094,110.452 100.9,110
GND on Top Layer "GND_L01_P071" (solid, pour order 71): 109.45,99.75 109.45,95.8 110.9,95.8 110.9,99.75
NetJ13_4 on Top Layer "NETJ13_4_L01_P070" (solid, pour order 70): 103.5,98.9 103.5,96.7 104.85,96.7 104.85,99.15 105.1,99.4 105.1,100.5 103.1,100.5 103.1,99.2
NetJ13_1 on Top Layer "NETJ13_1_L01_P069" (solid, pour order 69): 103.1,98.95 103.1,96.7 100.95,96.7 100.35,97.3 100.35,98.95
GND on Top Layer "GND_L01_P068" (solid, pour order 68): 139.1,99 140.6,99 140.6,96.65 139.1,96.65
GND on Top Layer "GND_L01_P067" (solid, pour order 67): 149.05,99 147.6,99 147.6,96.65 149.05,96.65
GND on Top Layer "GND_L01_P066" (solid, pour order 66): 140.95,98.9 142.3,98.9 142.3,96.7 140.95,96.7
GND on Top Layer "GND_L01_P065" (solid, pour order 65): 143.4,98.9 144.75,98.9 144.75,96.7 143.4,96.7
GND on Top Layer "GND_L01_P064" (solid, pour order 64): 147.2,98.9 145.85,98.9 145.85,96.7 147.2,96.7
NetJ3_12 on Top Layer "NETJ3_12_L01_P046" (solid, pour order 46): 103.15,61 102.3,61 101.825,60.525 102.116,60.234 102.316,60.185 102.581,60.45 103.15,60.45
NetJ3_2 on Top Layer "NETJ3_2_L01_P049" (solid, pour order 49): 90.05,56.752 90.05,55.331 90.893,54.488 95.351,54.501 98.85,58 100.519,58 100.982,58.301 101.4,58.301 101.4,59.653 101.001,59.653 100.707,59.7 96,59.7 93.328,57.028 90.325,57.028
NetJ3_16 on Top Layer "NETJ3_16_L01_P053" (solid, pour order 53): 103.3,59.749 103.188,59.627 102.827,59.627 102.827,59.05 103.4,59.05 103.8,59.45 103.8,60.973 103.3,60.973
GND on Top Layer "GND_L01_P057" (solid, pour order 57): 100.947,56.5 100.947,61.5 100.947,62.9 103.253,62.9 103.253,56.5
GND on Bottom Layer "GND_L02_P081" (solid, remove dead copper, pour order 81): 45.362,134.967 45.489,135.094 125.499,135.094 125.499,86.326 125.626,86.199 125.499,86.072 47.013,86.072
NetJ13_31 on Bottom Layer "NETJ13_31_L02_P044" (solid, pour order 44): 100.85,107.3 100.85,109.95 102.65,109.95 102.65,107.45 101.85,106.65
5V on Bottom Layer "5V_L02_P062" (solid, pour order 62): 110,105.35 110,108.95 112,108.95 112,105.35
5V on Bottom Layer "5V_L02_P063" (solid, pour order 63): 106,95.8 106,97.95 107.45,97.95 107.45,95.8
NetJ13_31 on Bottom Layer "NETJ13_31_L02_P075" (solid, pour order 75): 105.9,95.8 105.9,98 104.75,98 105.05,96.457 105.05,95.8
GND on Bottom Layer "GND_L02_P078" (solid, remove dead copper, pour order 78): 143.999,87.236 150.5,87.236 150.5,100.5 166.2,100.5 166.2,46.9 144,46.9
GND on Bottom Layer "GND_L02_P079" (solid, remove dead copper, pour order 79): 85.25,130 164.75,130 164.75,94.5 85.25,94.5
GND on Bottom Layer "GND_L02_P076" (solid, remove dead copper, pour order 76): 85.3,100.5 104.3,100.5 104.3,46.9 85.3,46.9

## Keep-outs
Keep-Out Layer:
  lines w0.2: 99.4,50.1 85.25,50.1 85.25,129.9 164.65,129.9 164.65,50.1 ; 99.4,64.3 104,64.3 104,56.15 99.4,56.15 99.4,50 85.25,50 85.25,130 164.75,130 164.75,50.009 ; 99.4,67.325 99.4,73.475 104,73.475 104,81.625 99.5,81.625 ; 99.4,94.6 111.2,94.6 ; 150.6,53.375 146,53.375 146,61.525 150.6,61.525 150.6,67.675 ; 150.6,70.775 146,70.775 146,78.925 150.6,78.925 150.6,85.075 ; 150.6,86.45 150.6,92.6
  lines w0.4: 83.208,90.771 51.1,90.771 51.1,130.014 83.208,130.014 83.208,119.695 83.208,100.709 83.208,90.898 ; 99.5,70.35 99.5,64.4 ; 99.5,87.65 99.5,92.599 ; 150.5,50 150.5,53.275 ; 150.5,64.625 150.5,70.675 ; 150.5,92.6 150.5,84.75 150.5,95.5 ; 150.508,50.009 164.75,50.009 ; 85.25,50 99.5,50 ; 85.25,50 85.25,130 ; 85.25,50 85.25,130 ; 85.25,50 99.5,50 ; 85.25,130 164.75,130 ; 85.25,130 164.75,130 ; 99.5,50 99.5,56.05 ; 99.5,50 99.5,56.05 ; 99.5,56.05 104.1,56.05 ; 99.5,56.05 104.1,56.05 ; 99.5,64.4 104.1,64.4 ; 99.5,64.4 104.1,64.4 ; 99.5,73.375 104.1,73.375 ; 99.5,73.375 104.1,73.375 ; 99.5,73.375 99.5,67.325 99.5,73.375 ; 99.5,81.725 99.5,94.501 111.2,94.501 111.2,99.25 111.2,100.5 119.4,100.5 138.8,100.5 138.8,99.7 138.8,95.5 150.5,95.5 ; 99.5,81.725 104.1,81.725 ; 99.5,81.725 104.1,81.725 ; 104.1,56.05 104.1,64.4 ; 104.1,56.05 104.1,64.4 ; 104.1,73.375 104.1,81.725 ; 104.1,73.375 104.1,81.725 ; 145.9,53.275 150.5,53.275 ; 145.9,53.275 150.5,53.275 ; 145.9,53.275 145.9,61.625 ; 145.9,53.275 145.9,61.625 ; 145.9,61.625 150.5,61.625 ; 145.9,61.625 150.5,61.625 ; 145.9,70.675 150.5,70.675 ; 145.9,70.675 150.5,70.675 ; 145.9,70.675 145.9,79.025 ; 145.9,70.675 145.9,79.025 ; 145.9,79.025 150.5,79.025 ; 145.9,79.025 150.5,79.025 ; 150.5,61.625 150.5,67.675 150.5,61.625 ; 150.5,79.025 150.5,85.075 150.5,79.025 ; 150.5,95.5 150.5,95.5 ; 164.75,130 164.75,50 164.75,130

## Silkscreen, mask and mechanical layers (free items; w line width, h text height)
Top Overlay:
  lines w0.2: 83.25,91.339 83.25,129.628 ; 85.25,91.285 85.25,129.673
Top Courtyard:
  lines w0.05: 99.5,56.05 104.1,56.05 104.1,64.4 99.5,64.4 99.5,56.05 ; 100,94.5 111.2,94.5 111.2,100.5 100,100.5 100,94.5 ; 138.8,95.5 150,95.5 150,100.5 138.8,100.5 138.8,95.5
Board outline:
  lines w0.05: 85,90.75 51.124,90.75 51.124,130 ; 85.001,90.749 85.25,90.749 85.25,50 99.5,50 ; 89.15,130 164.75,130 164.75,50 150.5,50 150.5,53.275 ; 89.168,130 51.124,130 ; 51.124,130 51.124,130 ; 99.5,50 99.5,50 ; 99.5,50 99.5,56.05 104.1,56.05 104.1,56.05 104.1,64.4 99.5,64.4 99.5,73.35 104.1,73.35 ; 99.5,94.5 99.5,81.692 99.508,81.7 104.1,81.7 104.1,81.7 104.1,73.35 ; 99.5,94.5 99.5,94.5 ; 99.5,94.5 111.2,94.5 111.2,100.5 ; 104.1,73.35 104.1,73.35 ; 111.2,100.5 111.2,100.5 ; 111.2,100.5 138.8,100.5 138.8,95.5 ; 138.8,95.5 138.8,95.5 ; 138.8,95.5 150.5,95.5 ; 145.9,53.275 145.9,61.624 ; 145.9,53.275 145.9,53.275 ; 145.9,53.275 150.5,53.275 ; 145.9,61.624 150.5,61.624 ; 145.9,61.624 145.9,61.624 ; 145.9,70.677 145.9,79.026 ; 145.9,70.677 145.9,70.677 ; 145.9,70.677 150.5,70.677 150.5,61.624 ; 145.9,79.026 150.5,79.026 150.5,95.5 ; 145.9,79.026 145.9,79.026 ; 150.5,53.275 150.5,53.275 ; 150.5,61.624 150.5,61.624 ; 150.5,95.5 150.5,95.5
  text "n1uAjQ" at 199.3,89.8 h1.52

## Text inside footprints (layer, text, board x,y; h text height)
J10: Mechanical 13 "PCB EDGE" at 149.48,131 h1.02 r180
J11: Mechanical 13 "PCB EDGE" at 165.75,122.58 h1.02 r90
J12: Mechanical 13 "PCB EDGE" at 165.75,111.33 h1.02 r90